# Altium PCB Glucometer-I.C.- Mis.PcbDoc
Units mm, origin at the board's own origin, x right, y up, seen from the top; angles counter-clockwise.
Board outline 18.45 x 15.95 mm, 2 copper layers (Top Layer, Bottom Layer); 3 components, 14 nets, 28 pads, 0 vias.
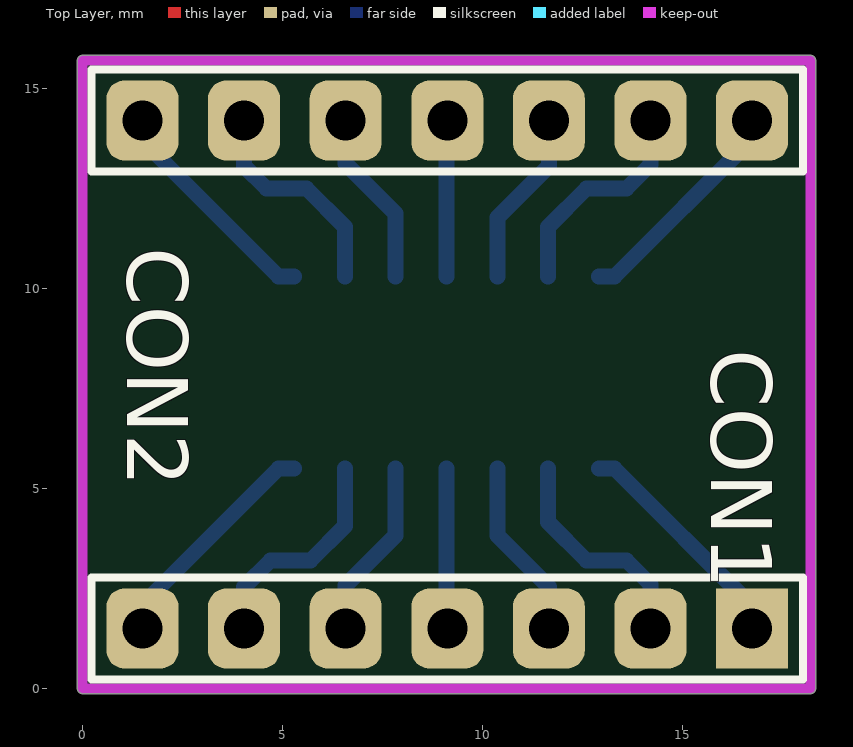
[diagram p0: Top Layer view]
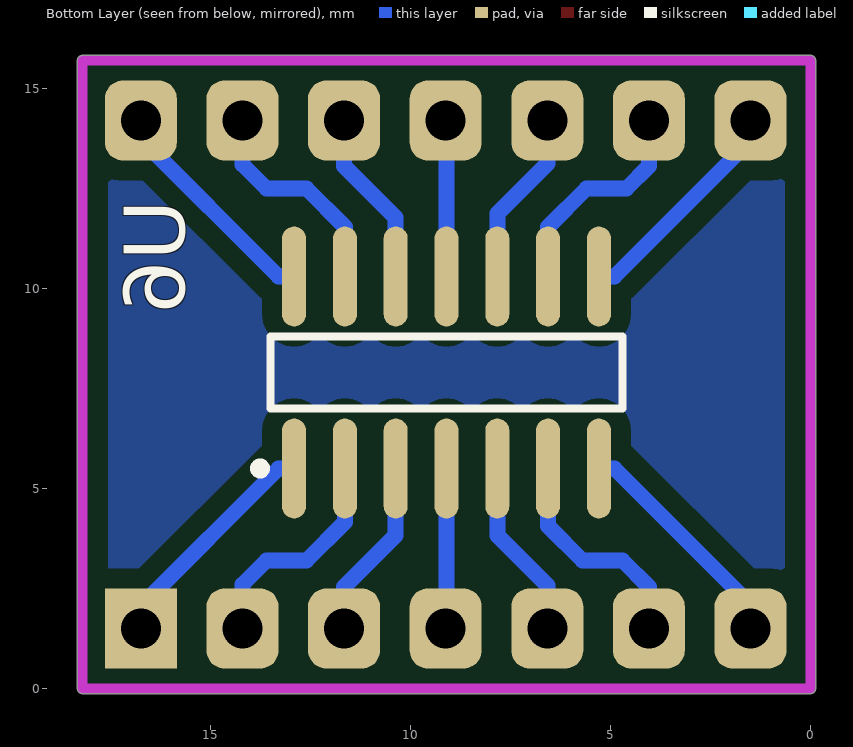
[diagram p1: Bottom Layer view, seen from below]

## Layer stack, top to bottom
Top Layer: signal copper 0.0356
Dielectric: dielectric 0.32, FR-4, Dk 4.8
Bottom Layer: signal copper 0.0356

## Board outline
0,-0.127 cw(c0,0) -0.127,0 -0.127,15.7 cw(c0,15.7) 0,15.827 18.2,15.827 cw(c18.2,15.7) 18.327,15.7 18.327,0 cw(c18.2,0) 18.2,-0.127

## Design rules (kind name [scope] priority, off if disabled: settings)
Clearance [All] p1: gap=0.3
PolygonConnect [All] p1: connectstyle=Relief reliefconductorwidth=0.254 reliefentries=4 polygonreliefangle="90 Angle" airgapwidth=0.254
RoutingVias [All] p1: holewidth=0.711 width=1.27 viastyle="Through Hole" minholewidth=0.711 minwidth=1.27 maxholewidth=0.711 maxwidth=1.27
SolderMaskExpansion [All] p1: expansion=0.102
Width [All] p1: maxlimit=5 minlimit=0.4 preferedwidth=0.4 minimp=50.000000 maximp=50.000000 favimp=50.000000
28 further rules are at their usual default settings.

## Components (designator, comment, footprint, x,y, rotation, side; value= is the part's Value field where it differs from the comment)
CON1 "Header 7" HDR1X7#1 16.74,1.5 r180 top
CON2 "Header 7" HDR1X7#2 1.5,14.2 r0 top
U6 "AD5241" R-14_N 9.1,7.9 r90 bottom

## Footprints (in the part's own frame and the unit in brackets; to place one, negate y for a bottom-side part, rotate by r counter-clockwise, add the part's x,y. Pads: shape width x height; smd on the part's side, far side on the other; paste and mask are expansions set on the pad)
HDR1X7#1 [mm] "Connector; Header; 7 Position"
  rect 1.8x2 hole 1: 1(0,0)
  rrect50% 1.8x2 hole 1: 2(2.54,0) 3(5.08,0) 4(7.62,0) 5(10.16,0) 6(12.7,0) 7(15.24,0)
  silkscreen extent -1.27,-1.27 16.51,1.27
HDR1X7#2 [mm] "Connector; Header; 7 Position"
  rrect50% 1.8x2 hole 1: 1(0,0) 2(2.54,0) 3(5.08,0) 4(7.62,0) 5(10.16,0) 6(12.7,0) 7(15.24,0)
  silkscreen extent -1.27,-1.27 16.51,1.27
R-14_N [mm] "14-Pin Narrow Body Small Outline Integrated Circuit 1.27 mm Pitch, IPC Medium Density"
  oval 2.5x0.6 smd: 1(-2.4,3.81) 2(-2.4,2.54) 3(-2.4,1.27) 4(-2.4,0) 5(-2.4,-1.27) 6(-2.4,-2.54) 7(-2.4,-3.81) 8(2.4,-3.81) 9(2.4,-2.54) 10(2.4,-1.27) 11(2.4,0) 12(2.4,1.27) 13(2.4,2.54) 14(2.4,3.81)
  silkscreen extent -2.52,-4.4 0.9,4.79, body extent -1.95,-4.33 1.95,4.33, height 1.75

## Part data
CON1 CON2: "Header, 7-Pin"
U6: "AD5241BR"

## Nets (pads, with @x,y where several pads share a name; then routed paths per layer and width w, separated by ;. In a path a pad name is that pad's centre, name@x,y a point inside that pad or via, vN(x,y) a via of type N, cw(c..) or ccw(c..) an arc to the next point about the centre after c; other vN are vias at no path point)
GND: CON2.3 U6.10 | length 4.4
  Bottom Layer w0.4: CON2.3 6.58,13.12 7.83,11.87 U6.10
NetCON1_1: CON1.1 U6.1 | length 5.8
  Bottom Layer w0.4: U6.1 13.3,5.5 16.74,2.06 CON1.1
NetCON1_2: CON1.2 U6.2 | length 5.6
  Bottom Layer w0.4: U6.2 11.64,4.16 12.6,3.2 13.6,3.2 14.2,2.6 CON1.2
NetCON1_3: CON1.3 U6.3 | length 4.5
  Bottom Layer w0.4: U6.3 10.37,3.83 11.66,2.54 CON1.3
NetCON1_4: CON1.4 U6.4 | length 4
  Bottom Layer w0.4: U6.4 9.1,1.52 CON1.4
NetCON1_5: CON1.5 U6.5 | length 4.5
  Bottom Layer w0.4: CON1.5 6.58,2.58 7.83,3.83 U6.5
NetCON1_6: CON1.6 U6.6 | length 5.6
  Bottom Layer w0.4: CON1.6 4.04,2.54 4.7,3.2 5.7,3.2 6.56,4.06 U6.6
NetCON1_7: CON1.7 U6.7 | length 5.8
  Bottom Layer w0.4: CON1.7 1.5,2.1 4.9,5.5 U6.7
NetCON2_1: CON2.1 U6.8 | length 5.7
  Bottom Layer w0.4: CON2.1 1.5,13.7 4.9,10.3 U6.8
NetCON2_2: CON2.2 U6.9 | length 5.5
  Bottom Layer w0.4: CON2.2 4.04,13.06 4.6,12.5 5.6,12.5 6.56,11.54 U6.9
NetCON2_4: CON2.4 U6.11 | length 3.9
  Bottom Layer w0.4: U6.11 CON2.4@9.1,14.18
NetCON2_5: CON2.5 U6.12 | length 4.4
  Bottom Layer w0.4: U6.12 10.37,11.77 11.66,13.06 CON2.5
NetCON2_6: CON2.6 U6.13 | length 5.5
  Bottom Layer w0.4: U6.13 11.64,11.54 12.6,12.5 13.6,12.5 14.2,13.1 CON2.6
NetCON2_7: CON2.7 U6.14 | length 5.7
  Bottom Layer w0.4: U6.14 13.3,10.3 16.74,13.74 CON2.7

## Polygon pours and split planes (outlines as drawn)
no net on Bottom Layer "Bottom Layer-No Net" (solid, pour order 3): 0,15.7 18.2,15.7 18.2,0 0,0

## Keep-outs
Keep-Out Layer:
  lines w0.254: 0,0 0,15.7 18.2,15.7 18.2,0 0,0

## Dimensions
1.5,14.2 to 1.5,1.5 on Top Overlay